# EAGLE board gospboard-v2 (EAGLE 8.7.1)
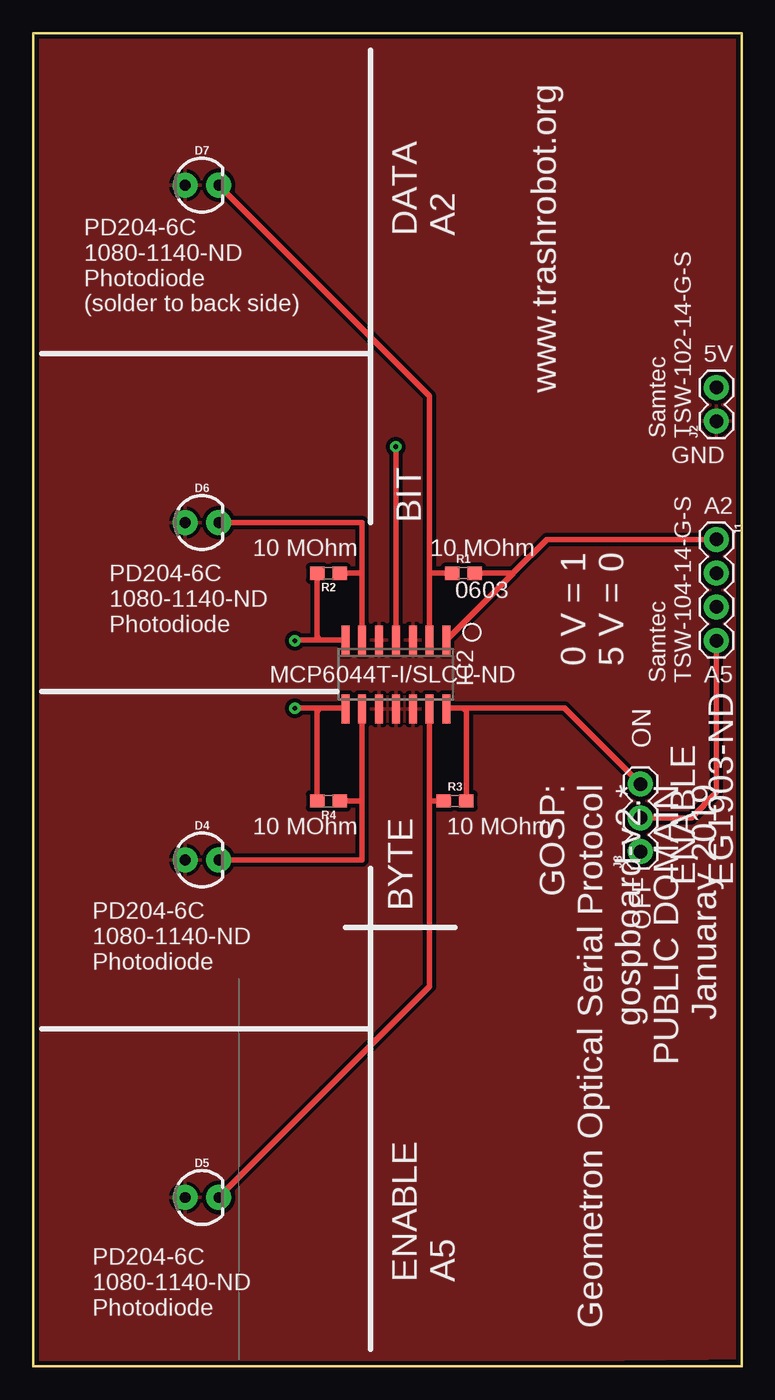
[diagram p0: board, top side]
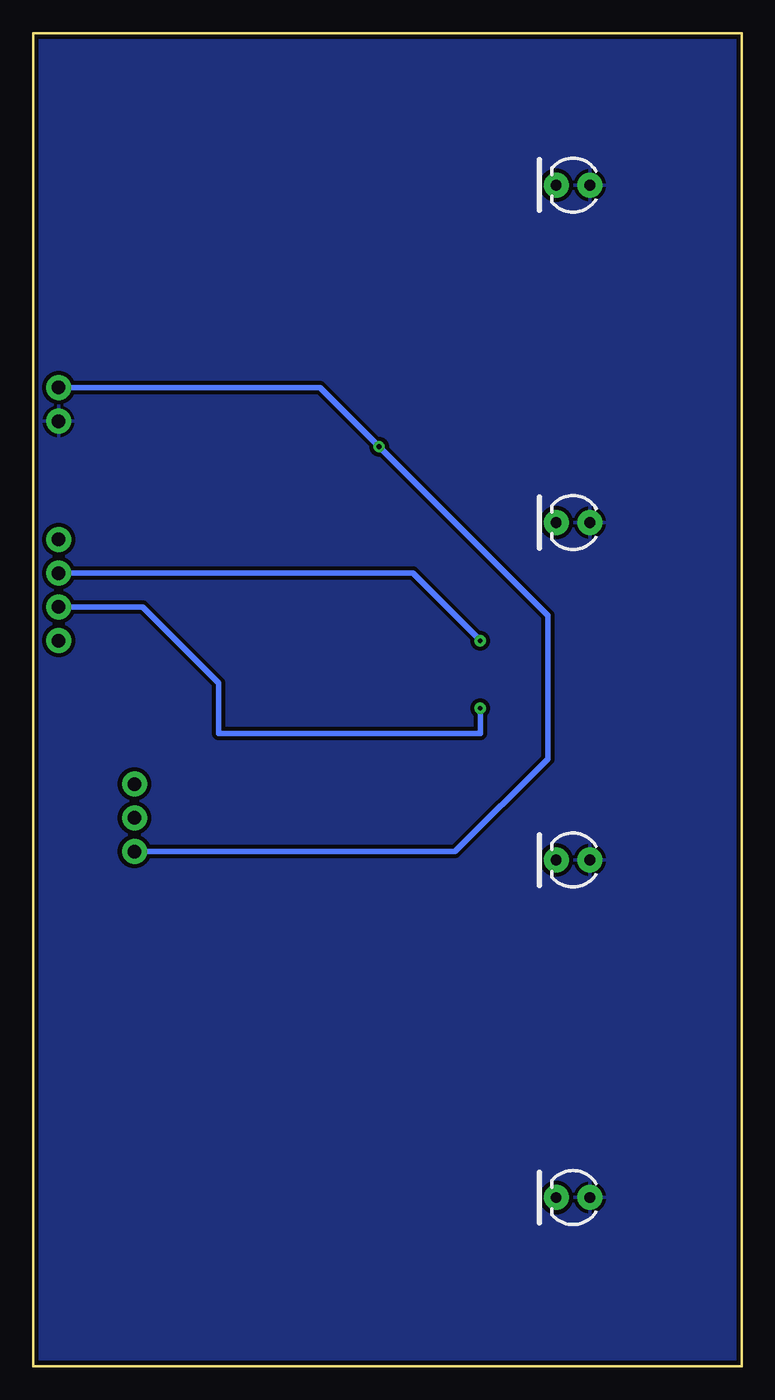
[diagram p1: board, bottom side, seen from below]

Size 53.34 x 100.33 mm. Coordinates in mm from the lower left corner, seen from the top.
Outline: 0,100.33 0,0 53.34,0 53.34,100.33 0,100.33
Copper layers (1*16): Top 0.035mm / dielectric 1.5mm / Bottom 0.035mm
Design rules "SparkFun": minimum track width 8mil, minimum drill 20mil, track to track 8mil, track to pad 8mil, pad to pad 8mil, via to via 8mil, smd to smd 8mil, copper to edge 10mil, drill to drill 8mil, minimum pad ring 12mil, minimum via ring 10mil, stop-mask expansion 4mil, vias tented up to drill 25mil, thermal gap 10mil
Net classes: 0 default: width 0.203 mm; 1 vcc: width 0.254 mm

## Footprints (pad centres in the part's own frame; a part is rotated, then mirrored left to right if it is on the bottom)
LED_3MM = drill 0.813 pad 1.88: A -1.27,0; K 1.27,0
SO14 = smd 0.6 x 2.2: 1 -3.81,-2.6; 2 -2.54,-2.6; 3 -1.27,-2.6; 4 0,-2.6; 5 1.27,-2.6; 6 2.54,-2.6; 7 3.81,-2.6; 8 3.81,2.6; 9 2.54,2.6; 10 1.27,2.6; 11 0,2.6; 12 -1.27,2.6; 13 -2.54,2.6; 14 -3.81,2.6
1X04 = drill 1.016 pad 1.88: 1 0,0; 2 2.54,0; 3 5.08,0; 4 7.62,0
1X02 = drill 1.016 pad 1.88: 1 0,0; 2 2.54,0
1X03 = drill 1.016 pad 1.88: 1 0,0; 2 2.54,0; 3 5.08,0
0603 = smd 1.1 x 1: 1 -0.85,0; 2 0.85,0

## Placement (x,y rotation side)
D4  [LED_3MM]  12.7,38.1 0 top
D5  [LED_3MM]  12.7,12.7 0 top
D6  [LED_3MM]  12.7,63.5 0 top
D7  [LED_3MM]  12.7,88.9 0 top
IC2  MCP604SL  [SO14]  27.3,52.07 180 top
J1  [1X04]  51.44,62.23 270 top
J2  [1X02]  51.44,71.12 90 top
J3  455-1750-1-ND  [1X03]  45.72,38.73 90 top
R1  10M  [0603]  32.38,59.69 0 top
R2  10M  [0603]  22.23,59.69 180 top
R3  10M  [0603]  31.75,42.55 0 top
R4  10M  [0603]  22.23,42.55 180 top

## Library data of the parts
D4-D7 = SparkFun-LED; PROD_ID: DIO-08794
IC2 = linear
J1 = SparkFun-Connectors; PROD_ID: CONN-09696
J2 = SparkFun-Connectors
J3 = SparkFun-Connectors; PROD_ID: XXX-00000
R1-R4 = SparkFun-Resistors; PROD_ID: RES-07868

## Nets
ENABLE: IC2.14 J3.3 R3.2
GND: D4.A D5.A D6.A D7.A IC2.3 IC2.5 IC2.10 IC2.11 IC2.12 J2.1
N$5: J1.4 J3.2
N$6: D7.K IC2.2 R1.1
N$8: IC2.8 J1.3 R4.2
N$9: D6.K IC2.6 R2.1
N$10: D4.K IC2.9 R4.1
N$11: IC2.7 J1.2 R2.2
N$13: D5.K IC2.13 R3.1
N$14: IC2.4 J2.2 J3.1
PIN1: IC2.1 J1.1 R1.2

## Tracks (layer width: path | path; a pad name or v marks a point on that pad's centre or on a via)
ENABLE
  Top 0.406: 32.38,49.53 31.18,49.53 IC2.14 | R3.2 32.6,49.31 32.38,49.53 | J3.3 40.01,49.53 32.38,49.53
GND
  pour Top (isolate 0.305): 0,100.33 53.34,100.33 53.98,0.64 0,0
  pour Bottom (isolate 0.305): 0,100.33 53.34,100.33 54.61,0 0,0
N$5
  Top 0.406: J3.2 49.53,41.27 51.44,43.18 J1.4
N$6
  Top 0.406: IC2.2 29.84,59.69 | 29.84,59.69 29.84,73.03 D7.K | R1.1 29.84,59.69
N$8  (via drill 0.35)
  Top 0.406: IC2.8 23.43,49.53 21.59,49.53 | 21.59,49.53 v19.68,49.53 | R4.2 21.38,49.31 21.59,49.53
  Bottom 0.406: v19.68,49.53 19.68,47.62 39.37,47.62 39.37,51.44 45.09,57.15 J1.3
N$9
  Top 0.406: IC2.6 24.77,59.69 | 24.77,59.69 24.77,63.5 D6.K | R2.1 24.77,59.69
N$10
  Top 0.406: IC2.9 24.77,42.55 | 24.77,42.55 24.77,38.1 D4.K | R4.1 24.77,42.55
N$11  (via drill 0.35)
  Top 0.406: IC2.7 21.59,54.67 | 21.59,54.67 19.75,54.67 v19.68,54.61 | R2.2 21.38,54.88 21.59,54.67
  Bottom 0.406: v19.68,54.61 24.77,59.69 J1.2
N$13
  Top 0.406: 29.84,42.55 29.84,28.57 D5.K | 29.84,42.55 IC2.13 | R3.1 29.84,42.55
N$14  (via drill 0.35)
  Top 0.406: IC2.4 v27.3,69.22
  Bottom 0.406: J2.2 31.75,73.66 v27.3,69.22 14.61,56.52 14.61,45.72 21.59,38.73 J3.1
PIN1
  Top 0.406: J1.1 38.67,62.23 36.16,59.72 36.13,59.69 | 36.13,59.69 IC2.1 | R1.2 36.13,59.69

## Text on the board
tPlace: www.trashrobot.org | DATA / A2 | PD204-6C / 1080-1140-ND / Photodiode / (solder to back side) | 5V | Samtec / TSW-102-14-G-S | GND | A2 | BIT | 10 MOhm | 10 MOhm | 0603 | PD204-6C / 1080-1140-ND / Photodiode | 0 V = 1 / 5 V = 0 | A5 | MCP6044T-I/SLCT-ND | Samtec / TSW-104-14-G-S | ON | GOSP: / Geometron Optical Serial Protocol / gospboard-v2.* / PUBLIC DOMAIN / Januaray 2019 | 10 MOhm | 10 MOhm | OFF | ENABLE / EG1903-ND | BYTE | PD204-6C / 1080-1140-ND / Photodiode | ENABLE / A5 | PD204-6C / 1080-1140-ND / Photodiode
tValues: Tent Vias! | Arduino Wee v1.3